# EAGLE board PCB_V0.2 (EAGLE 9.7.0)
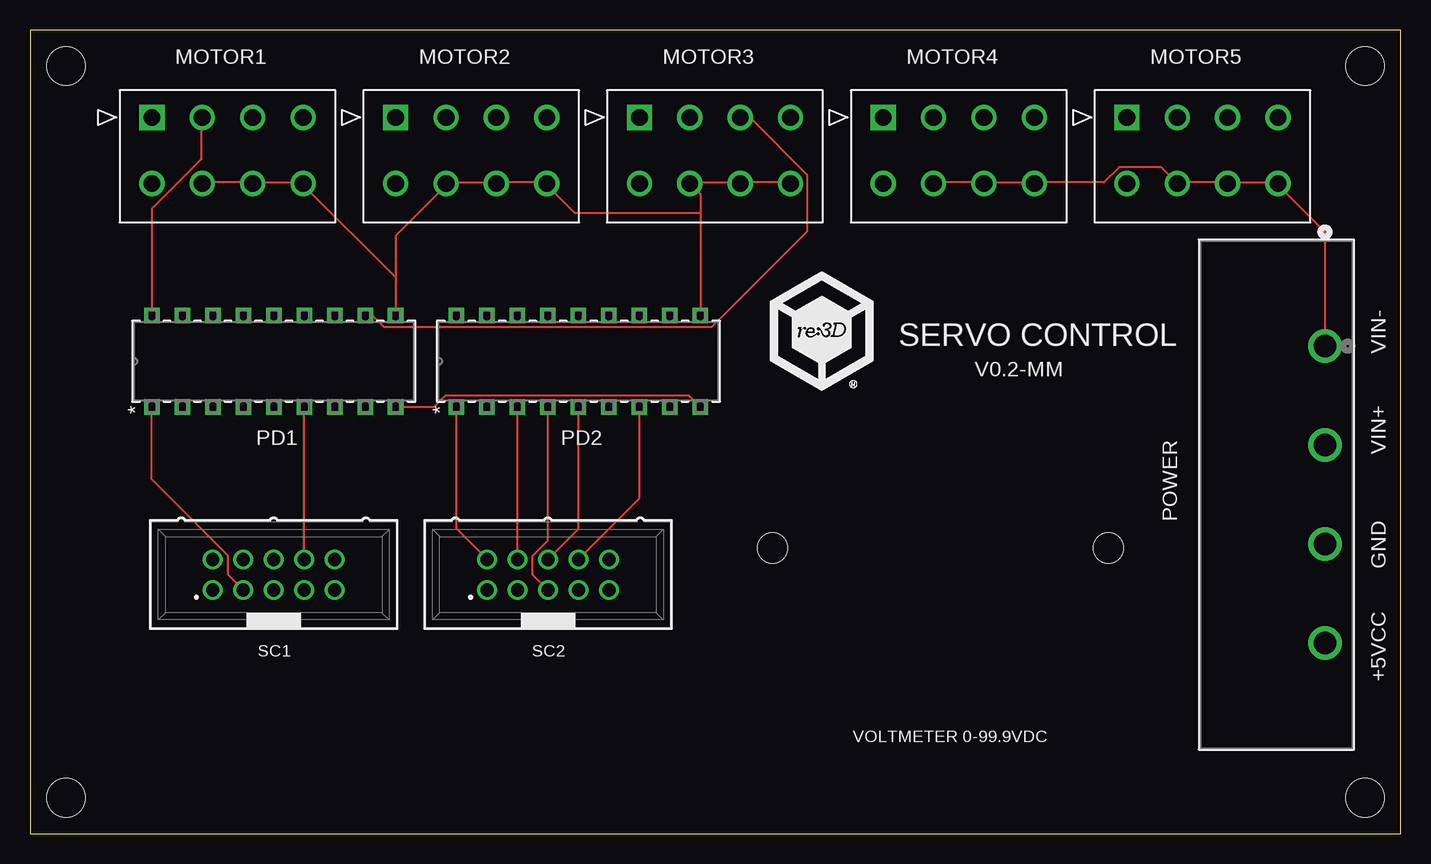
[diagram p0: board, top side]
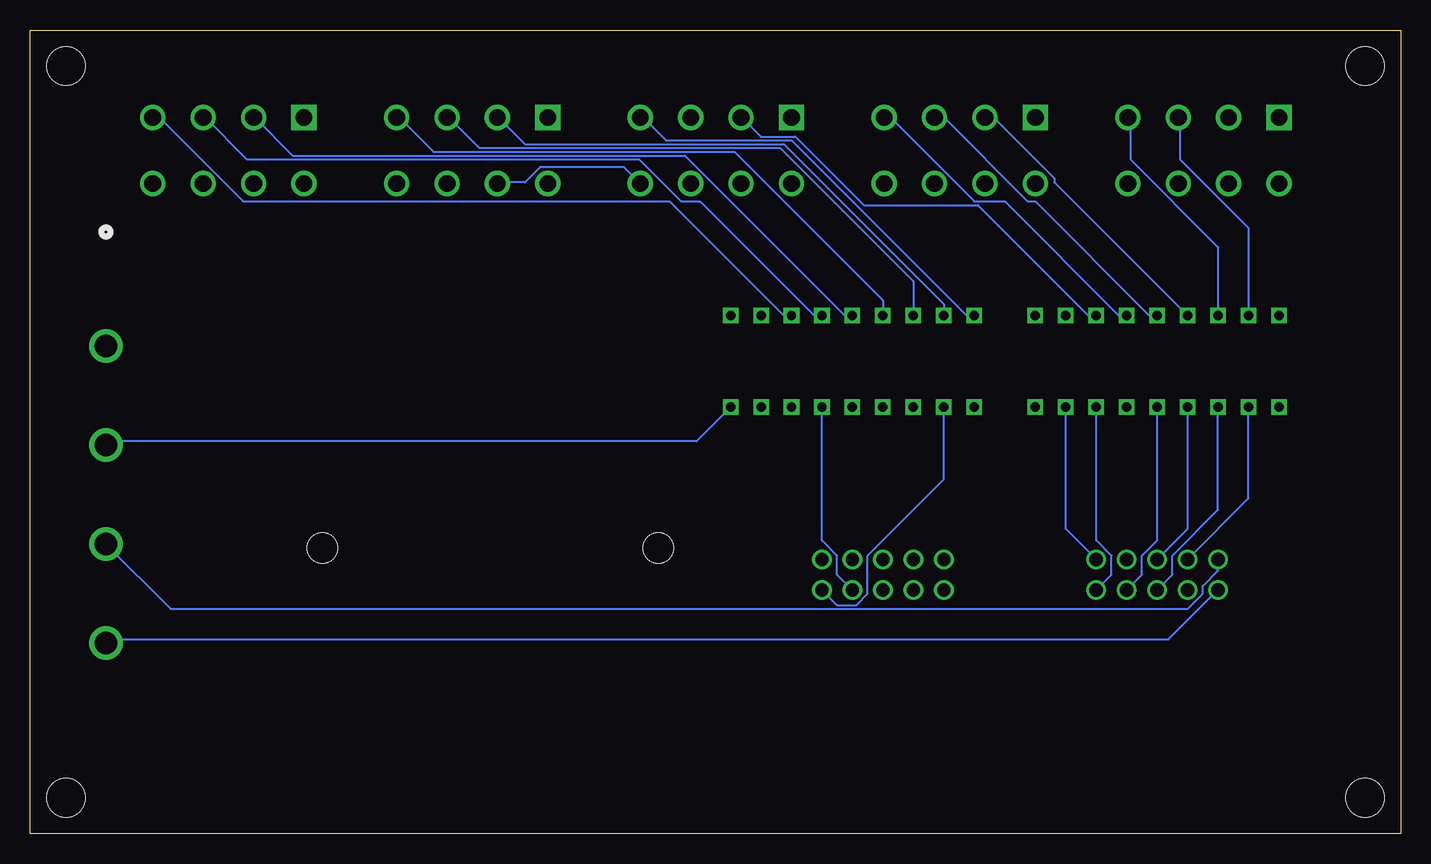
[diagram p1: board, bottom side, seen from below]

Size 114.28 x 66.98 mm. Coordinates in mm from the lower left corner, seen from the top.
Outline: 0,66.98 0,0 114.28,0 114.28,66.98 0,66.98
Copper layers (1*16): Top 0.035mm / dielectric 1.5mm / Bottom 0.035mm
Design rules "Fusion Electronics Design Rules": minimum track width 6mil, minimum drill 0.35mm, track to track 6mil, track to pad 6mil, pad to pad 6mil, via to via 6mil, smd to smd 6mil, copper to edge 40mil, drill to drill 6mil, minimum pad ring 10mil, minimum via ring 8mil, stop-mask expansion 4mil, vias tented up to drill 0mil, thermal gap 10mil
Holes 2.5 mm at 61.9,23.82 89.91,23.81
Holes 3.2 mm at 3,3 3,63.98 111.28,63.98 111.28,3
tRestrict: area 61,14 to 91.4,34.3; area 62.2,36.8 to 96.5,47

## Footprints (pad centres in the part's own frame; a part is rotated, then mirrored left to right if it is on the bottom)
CON_1724470208 = drill 1.4 pad 1.9 square: 1 0,0 | drill 1.4 pad 1.9: 2 -4.2,0; 3 -8.4,0; 4 -12.6,0; 5 0,5.5; 6 -4.2,5.5; 7 -8.4,5.5; 8 -12.6,5.5
PDIP18_N_MCH = drill 0.787 pad 1.295 square: 1 0,0; 2 0,-2.54; 3 0,-5.08; 4 0,-7.62; 5 0,-10.16; 6 0,-12.7; 7 0,-15.24; 8 0,-17.78; 9 0,-20.32; 10 7.62,-20.32; 11 7.62,-17.78; 12 7.62,-15.24; 13 7.62,-12.7; 14 7.62,-10.16; 15 7.62,-7.62; 16 7.62,-5.08; 17 7.62,-2.54; 18 7.62,0
CONN4_K42104030_OST = drill 1.854 pad 2.362: 1 0,0; 2 8.25,0; 3 16.5,0; 4 24.75,0
61201021621 = drill 1.1: 1 -5.08,-1.27; 2 -5.08,1.27; 3 -2.54,-1.27; 4 -2.54,1.27; 5 0,-1.27; 6 0,1.27; 7 2.54,-1.27; 8 2.54,1.27; 9 5.08,-1.27; 10 5.08,1.27

## Placement (x,y rotation side)
MOTOR1  1724470208CON_1724470208  [CON_1724470208]  10.16,59.69 180 top
MOTOR2  1724470208CON_1724470208  [CON_1724470208]  30.48,59.69 180 top
MOTOR3  1724470208CON_1724470208  [CON_1724470208]  50.8,59.69 180 top
MOTOR4  1724470208CON_1724470208  [CON_1724470208]  71.12,59.69 180 top
MOTOR5  1724470208CON_1724470208  [CON_1724470208]  91.44,59.69 180 top
PD1  MIC2981/82YNPDIP18_N_MCH  [PDIP18_N_MCH]  10.16,35.56 90 top
PD2  MIC2981/82YNPDIP18_N_MCH  [PDIP18_N_MCH]  35.56,35.56 90 top
POWER  OSTYK42104030CONN4_K42104030_OST  [CONN4_K42104030_OST]  107.95,40.64 270 top
SC1  61201021621  [61201021621]  20.32,21.59 0 top
SC2  61201021621  [61201021621]  43.18,21.59 0 top

## Library data of the parts
MOTOR1-MOTOR5 = 2024-10-14_18-11-13_Library; COPYRIGHT: Copyright (C) 2024 Ultra Librarian. All rights reserved.; MANUFACTURER_PART_NUMBER: 1724470208; MFR_NAME: Molex Connector Corporation
PD1 PD2 = 2024-10-01_17-12-49_Library; COPYRIGHT: Copyright (C) 2024 Ultra Librarian. All rights reserved.; MANUFACTURER_PART_NUMBER: MIC2981/82YN; MFR_NAME: Micrel / Microchip Technology
POWER = 2024-10-15_17-28-16_Library; COPYRIGHT: Copyright (C) 2024 Ultra Librarian. All rights reserved.; DIGI-KEY_PART_NUMBER_1: ED2947-ND; DIGI-KEY_PART_NUMBER_2: ED2947-NDL; MANUFACTURER_PART_NUMBER: OSTYK42104030; MFR_NAME: TT Electronics
SC1 SC2 = 6120XX21621_61201021621; CONTACT-RESISTANCE: 20mOhm; DATASHEET-URL: https://www.we-online.com/redexpert/spec/61201021621?ae; GENDER: Male; IR: 3A; LENGTH: 20.36mm; MOUNT: THT; PACKAGING: Tray; PART-NUMBER: 61201021621; PINS: 10; PITCH: 2.54mm; TYPE: Straight; WORKING-VOLTAGE: 250V(AC)

## Nets
+5VCC: POWER.4 SC1.1
A1+: MOTOR1.3 PD1.17
A2+: MOTOR2.3 PD1.14
A3+: MOTOR3.3 PD1.11
A4+: MOTOR4.3 PD2.16
A5+: MOTOR5.3 PD2.13
B1+: MOTOR1.2 PD1.18
B2+: MOTOR2.2 PD1.15
B3+: MOTOR3.2 PD1.12
B4+: MOTOR4.2 PD2.17
B5+: MOTOR5.2 PD2.14
ENA1+: MOTOR1.4 PD1.16
ENA2+: MOTOR2.4 PD1.13
ENA3+: MOTOR3.4 PD2.18
ENA4+: MOTOR4.4 PD2.15
ENA5+: MOTOR5.4 PD2.12
GND: MOTOR1.6 MOTOR1.7 MOTOR1.8 MOTOR2.6 MOTOR2.7 MOTOR2.8 MOTOR3.6 MOTOR3.7 MOTOR3.8 MOTOR4.6 MOTOR4.7 MOTOR4.8 MOTOR5.6 MOTOR5.7 MOTOR5.8 PD1.10 PD2.10 POWER.1
GND1: POWER.3 SC1.2
PA0: PD1.4 SC1.6
PA1: PD1.2 SC1.4
PA5: PD1.7 SC1.9
PA28: PD1.3 SC1.5
PB2: PD1.6 SC1.8
PB3: PD2.4 SC2.5
PB6: PD2.1 SC2.2
PB8: PD2.3 SC2.4
PB12: PD1.8 SC1.10
PB13: PD1.5 SC1.7
PB24: PD2.6 SC2.7
PB26: PD2.2 SC2.9
PC2: PD1.1 SC1.3
PD1: PD2.5 SC2.6
PD3: PD2.7 SC2.8
VIN: PD1.9 PD2.9 POWER.2

## Tracks (layer width: path | path; a pad name or v marks a point on that pad's centre or on a via)
+5VCC
  Bottom 0.152: SC1.1 19.37,16.19 107.95,16.19 POWER.4
A1+
  Bottom 0.152: PD1.17 12.7,50.48 18.41,56.2 18.41,59.69 MOTOR1.3
A2+
  Bottom 0.152: PD1.14 20.95,43.18 30.48,52.7 31.11,52.7 38.1,59.69 MOTOR2.3
A3+
  Top 0.152: PD1.11 28.57,43.18 29.53,42.23 56.83,42.23 64.77,50.16 64.77,54.93 60.01,59.69 MOTOR3.3
A4+
  Bottom 0.152: PD2.16 40.64,46.04 51.75,57.15 76.84,57.15 79.38,59.69 MOTOR4.3
A5+
  Bottom 0.152: PD2.13 48.9,43.18 58.42,52.7 60.01,52.7 63.5,56.2 96.2,56.2 99.7,59.69 MOTOR5.3
B1+
  Top 0.152: PD1.18 10.16,52.07 14.29,56.2 14.29,59.69 MOTOR1.2
B2+
  Bottom 0.152: PD1.15 28.89,54.29 28.89,54.61 33.97,59.69 MOTOR2.2
B3+
  Bottom 0.152: PD1.12 26.03,43.18 35.24,52.39 44.77,52.39 50.48,58.1 53.34,58.1 54.93,59.69 MOTOR3.2
B4+
  Bottom 0.152: PD2.17 38.1,44.13 51.43,57.47 73.03,57.47 75.25,59.69 MOTOR4.2
B5+
  Bottom 0.152: PD2.14 46.35,43.18 59.69,56.52 92.39,56.52 95.57,59.69 MOTOR5.2
ENA1+
  Bottom 0.152: PD1.16 15.24,48.89 22.54,56.2 22.54,59.69 MOTOR1.4
ENA2+
  Bottom 0.152: PD1.13 23.49,43.18 33.02,52.7 35.56,52.7 42.54,59.69 MOTOR2.4
ENA3+
  Bottom 0.152: PD2.18 36.2,43.18 50.8,57.78 61.28,57.78 63.18,59.69 MOTOR3.4
ENA4+
  Bottom 0.152: PD2.15 43.18,44.45 55.56,56.83 80.65,56.83 83.5,59.69 MOTOR4.4
ENA5+
  Bottom 0.152: PD2.12 51.43,43.18 60.96,52.7 96.52,52.7 103.51,59.69 MOTOR5.4
GND
  Top 0.152: MOTOR4.6 75.57,54.29 79.38,54.29 MOTOR4.7 79.69,54.29 83.5,54.29 MOTOR4.8 83.82,54.29 89.54,54.29 90.81,55.56 94.3,55.56 95.57,54.29 MOTOR5.6 95.89,54.29 99.7,54.29 MOTOR5.7 100.01,54.29 103.82,54.29 MOTOR5.8 104.14,53.97 107.95,50.16 POWER.1 | MOTOR3.8 63.18,54.29 59.37,54.29 MOTOR3.7 59.05,54.29 55.24,54.29 MOTOR3.6 55.24,53.97 55.88,53.34 55.88,51.75 | 55.88,51.75 PD2.10 | MOTOR1.6 14.6,54.29 18.41,54.29 MOTOR1.7 18.73,54.29 22.54,54.29 MOTOR1.8 22.86,53.97 30.48,46.36 | 30.48,46.36 30.48,49.85 34.61,53.97 MOTOR2.6 34.92,54.29 38.73,54.29 MOTOR2.7 39.05,54.29 42.86,54.29 MOTOR2.8 43.18,53.97 45.4,51.75 55.88,51.75 | 30.48,46.36 PD1.10
  Bottom 0.152: MOTOR4.6 75.25,54.29 73.03,54.29 71.76,55.56 64.77,55.56 63.5,54.29 MOTOR3.8
GND1
  Bottom 0.152: SC1.2 15.24,21.91 16.51,20.64 16.51,20 17.78,18.73 102.55,18.73 POWER.3
PA0
  Bottom 0.152: PD1.4 17.78,25.4 SC1.6
PA1
  Bottom 0.152: PD1.2 12.7,27.94 SC1.4
PA5
  Bottom 0.152: PD1.7 25.4,24.45 24.13,23.18 24.13,21.59 SC1.9
PA28
  Bottom 0.152: PD1.3 15.24,26.99 19.05,23.18 19.05,21.59 SC1.5
PB2
  Top 0.152: SC1.8 PD1.6
PB3
  Top 0.152: PD2.4 43.18,24.45 41.91,23.18 41.91,21.59 SC2.5
PB6
  Top 0.152: PD2.1 35.56,25.4 SC2.2
PB8
  Top 0.152: SC2.4 PD2.3
PB12
  Bottom 0.152: PD1.8 27.94,25.4 SC1.10
PB13
  Bottom 0.152: PD1.5 20.32,24.45 21.59,23.18 21.59,21.59 SC1.7
PB24
  Bottom 0.152: PD2.6 48.26,24.45 46.99,23.18 46.99,21.59 SC2.7
PB26
  Bottom 0.152: PD2.2 38.1,29.53 44.45,23.18 44.45,20 45.4,19.05 46.99,19.05 SC2.9
PC2
  Top 0.152: PD1.1 10.16,29.53 16.51,23.18 16.51,21.59 SC1.3
PD1
  Top 0.152: PD2.5 45.72,25.4 SC2.6
PD3
  Top 0.152: PD2.7 50.8,27.94 SC2.8
VIN
  Top 0.152: PD1.9 33.66,35.56 34.61,36.51 54.93,36.51 PD2.9
  Bottom 0.152: PD2.9 58.74,32.7 107.95,32.7 POWER.2

## Text on the board
tNames: SERVO CONTROL | VIN- | V0.2-MM | VIN+ | GND | +5VCC | VOLTMETER 0-99.9VDC